# Altium PCB wificar.PcbDoc (part 2 of 3)
Units mil, origin at the board's own origin, x right, y up, seen from the top; angles counter-clockwise.
Board outline 3940.12 x 3943.17 mil, 2 copper layers (Top Layer, Bottom Layer); 89 components, 114 nets, 455 pads, 176 vias.
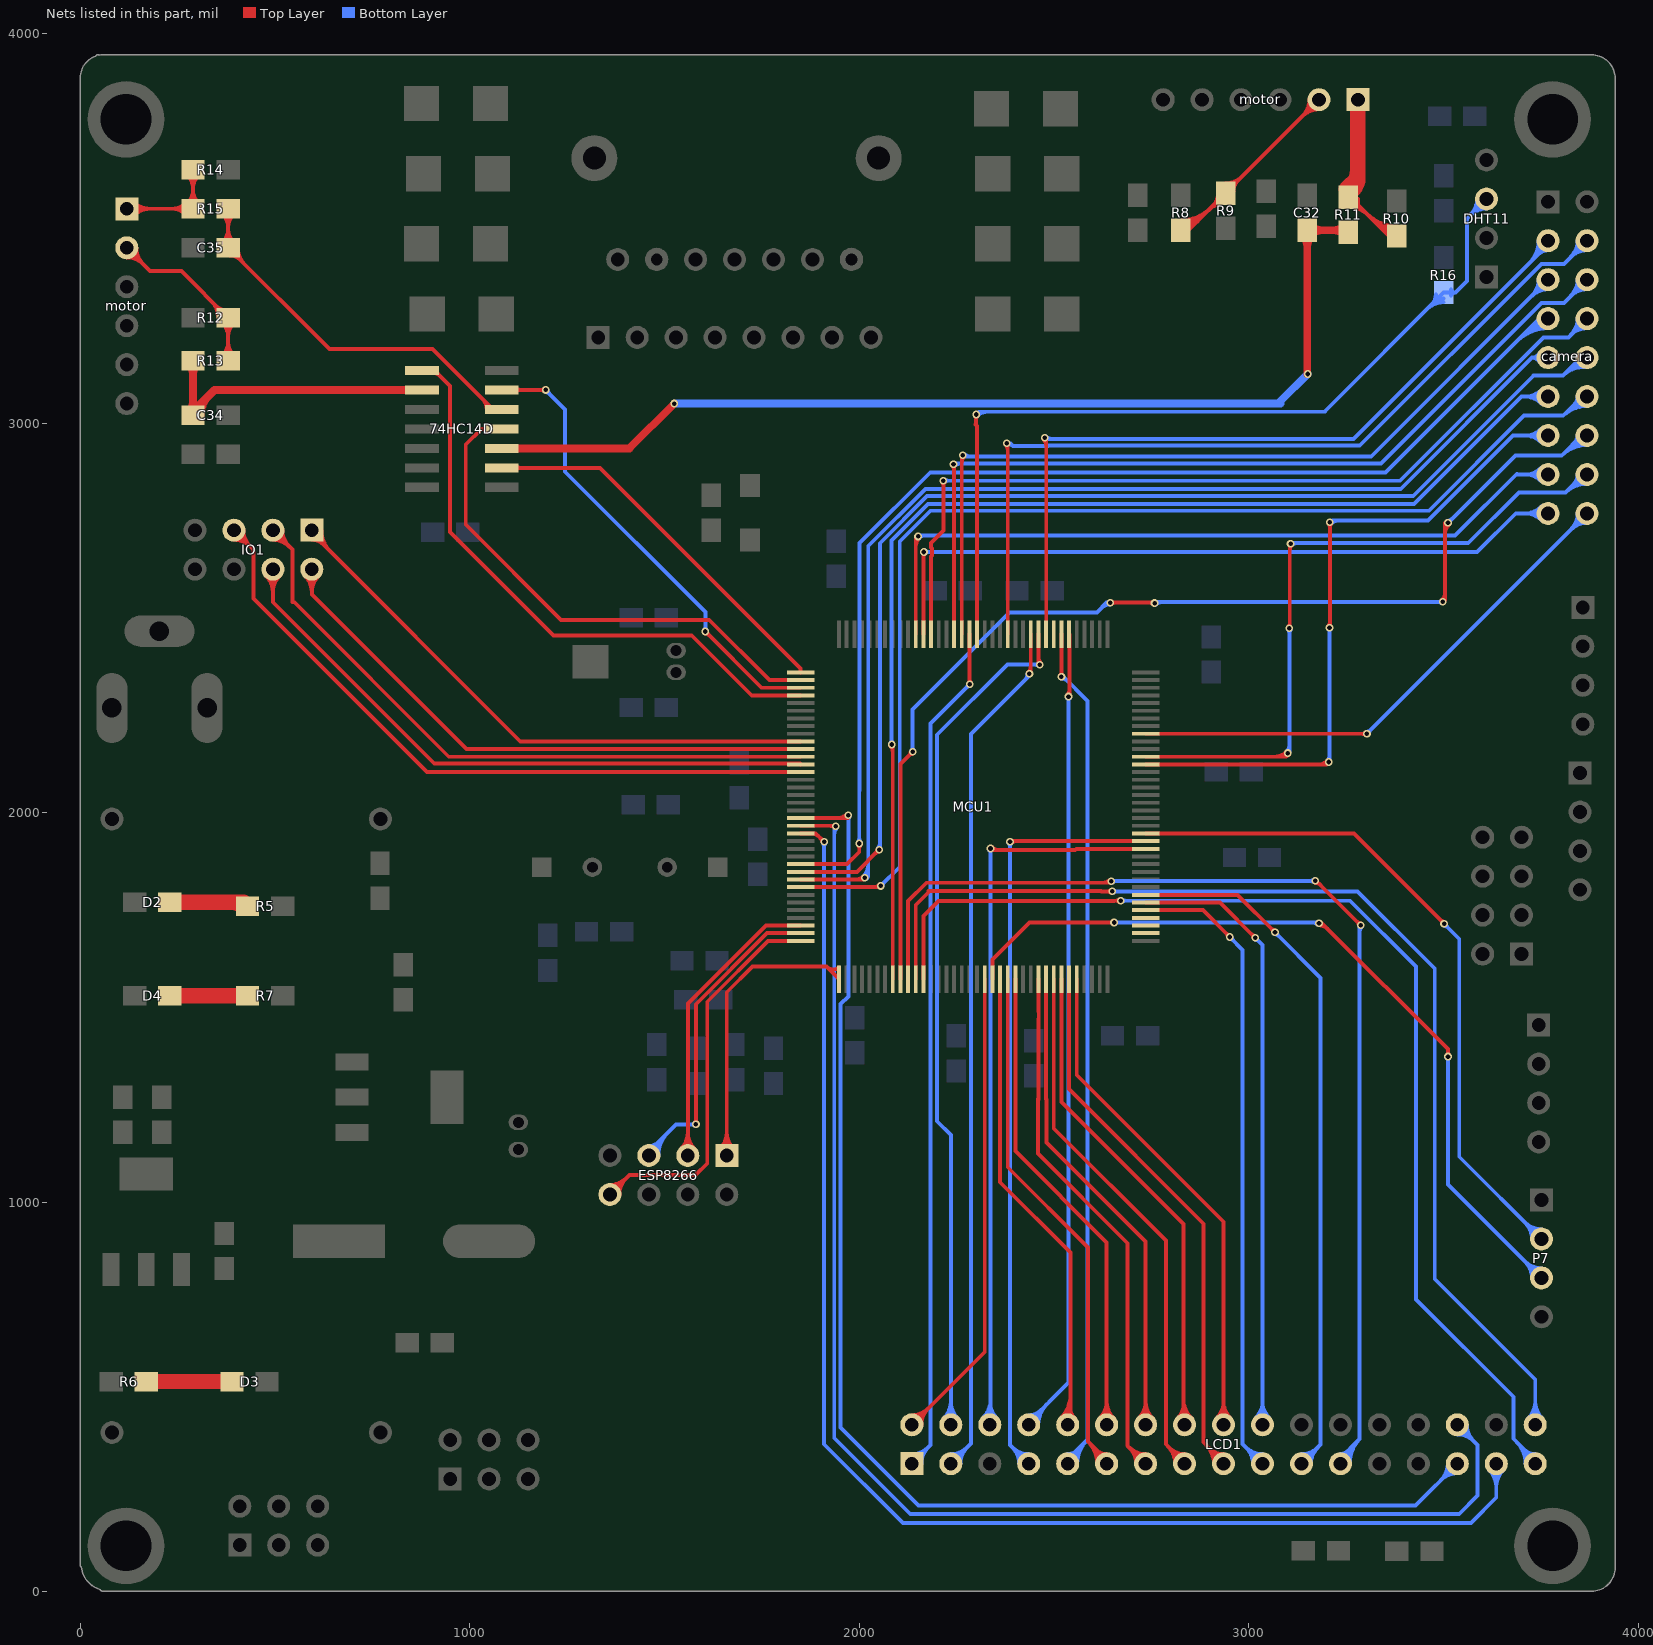
[diagram p2: the nets of this part, all layers, seen from the top]

## Via types
v1: diameter 19.68, hole 11.81, Top Layer to Bottom Layer, 175 vias
v2: diameter 50, hole 28, Top Layer to Bottom Layer, 1 vias

## Nets (pads, with @x,y where several pads share a name; then routed paths per layer and width w, separated by ;. In a path a pad name is that pad's centre, name@x,y a point inside that pad or via, vN(x,y) a via of type N, cw(c..) or ccw(c..) an arc to the next point about the centre after c; other vN are vias at no path point) (continued)
NetC32_2: 74HC14D.3 C32.2 R11.1 | length 2798.1
  Top Layer w20: 74HC14D.3@1082.36,2935 1410,2935 v1(1525,3050) ; C32.2@3139.33,3479.39 cw(c3113.72,3453.79) 3149.94,3453.79 cw(c3186.15,3453.79) C32.2@3160.54,3479.39 ; v1@3149.94,3126 C32.2@3149.94,3495 3250.06,3495 R11.1@3255.06,3490 ; C32.2@3160.54,3484.39 cw(c3186.15,3458.79) 3186.15,3495 cw(c3186.15,3531.21) C32.2@3160.54,3505.61 ; R11.1@3244.46,3484.39 ccw(c3218.85,3458.79) 3218.85,3495 ccw(c3218.85,3531.21) R11.1@3244.46,3505.61
  Bottom Layer w20: v1(1525,3050) 3081,3050 3081,3056 v1(3151,3126)
NetC34_2: 74HC14D.9 C34.2 R13.1 | length 930.8
  Top Layer w10: C34.2@290,3020.06 290,3030 C34.2@290,3020.06
  Top Layer w20: C34.2@279.39,3030.67 ccw(c253.78,3056.28) 290,3056.28 ; R13.1@279.39,3149.33 cw(c253.79,3123.72) 290,3123.72 cw(c326.21,3123.72) R13.1@300.61,3149.33 ; 290,3056.27 ccw(c326.21,3056.27) C34.2@300.61,3030.67 ; R13.1@290,3159.94 290,3030 345,3085 74HC14D.9@877.64,3085 ; C34.2@310,3020.06 cw(c382.27,3020.06) 331.17,3071.17
NetC35_1: 74HC14D.5 C35.1 R15.1 | length 1260.5
  Top Layer w10: C35.1@365.86,3464.14 ccw(c331.72,3498.28) 380,3498.28 ccw(c428.28,3498.28) C35.1@394.14,3464.14 ; R15.1@365.86,3535.86 cw(c331.72,3501.72) 380,3501.72 cw(c428.28,3501.72) R15.1@394.14,3535.86 ; R15.1@380,3550 C35.1@380,3450 640,3190 905,3190 1060,3035 74HC14D.5@1082.36,3035 ; C35.1@385,3430 cw(c385,3393.79) 410.61,3419.39 ; C35.1@395,3450 ccw(c431.21,3450) 405.61,3424.39 ; C35.1@405,3450 ccw(c465.36,3450) 422.68,3407.32 ; 1032.78,3062.22 cw(c1005.56,3035) 74HC14D.5@1044.05,3035
NetD2_1: D2.1 R5.2 | length 241.4
  Top Layer w39: D2.1@230,1770.06 420,1770.06 R5.2@430,1760.06 ; 387.58,1770.06 cw(c387.58,1722.64) R5.2@421.11,1756.17
NetD3_1: D3.1 R6.2 | length 220
  Top Layer w39: R6.2@170,539.94 D3.1@390,539.94
NetD4_1: D4.1 R7.2 | length 200
  Top Layer w39: D4.1@230,1530.06 R7.2@430,1530.06
NetJ1_2: 
NetJP4_1: motor.1@3280,3830 R10.1 R11.2 | length 907.6
  Top Layer w10: R11.2@3255.06,3555 cw(c3255.06,3482.73) 3306.17,3533.83 ; R11.2@3255.06,3565 cw(c3255.06,3516.87) 3289.1,3550.9 ; R11.2@3275.06,3575 ccw(c3299.36,3575) 3282.18,3557.82 ; 3280.06,3575 3280.06,3559.94 3360,3480 R10.1@3380.06,3480 ; 3303.13,3536.87 ccw(c3380.06,3613.8) R10.1@3380.06,3505 ; 3320.2,3519.8 ccw(c3380.06,3579.66) R10.1@3380.06,3495 ; 3337.28,3502.72 ccw(c3380.06,3545.51) R10.1@3380.06,3485 ; 3354.35,3485.65 ccw(c3380.06,3511.37) R10.1@3380.06,3475
  Top Layer w40: R11.2@3250,3600 3280,3630 ; R11.2@3251.53,3588.54 ccw(c3182.79,3657.27) 3280,3657.27 ; R11.2@3253.13,3589.61 ccw(c3236.21,3630) 3280,3630 ; R11.2@3260.06,3585 cw(c3320.57,3585) 3277.79,3627.79 ; motor.1@3280,3830 3280,3630
NetJP4_2: motor.2@3180,3830 R8.1 R9.2 | length 1077.8
  Top Layer w10: R8.1@2825.06,3490 ccw(c2825.06,3526.22) 2850.67,3500.61 ; R8.1@2825.06,3495 2845.06,3495 R9.2@2940.06,3590 2940.06,3590.06 motor.2@3180,3830 ; R8.1@2825.06,3500 ccw(c2825.06,3560.36) 2867.74,3517.68 ; R8.1@2825.06,3510 ccw(c2825.06,3594.5) 2884.81,3534.75 ; R8.1@2825.06,3520 ccw(c2825.06,3628.64) 2901.89,3551.82 ; 2897.39,3547.32 cw(c2940.06,3504.64) R9.2@2940.06,3565 ; 2909.46,3559.39 ccw(c2883.85,3585) R9.2@2920.06,3585 ; 2914.46,3564.39 cw(c2940.06,3538.79) R9.2@2940.06,3575 ; R9.2@2940.06,3605 ccw(c2940.06,3641.06) 2965.56,3615.56 ; R9.2@2940.06,3615 ccw(c2940.06,3675.2) 2982.63,3632.63 ; R9.2@2960.06,3595 cw(c2996.43,3595) 2970.72,3620.72 ; motor.2@3155.47,3830 cw(c3096.26,3830) 3138.13,3788.13 cw(c3180,3746.26) motor.2@3180,3805.47 ; motor.2@3165.47,3830 cw(c3130.4,3830) 3155.2,3805.2 cw(c3180,3780.4) motor.2@3180,3815.47
NetJP5_1: motor.1@120,3549.94 R14.2 R15.2 | length 649.8
  Top Layer w10: motor.1@120,3549.94 R15.2@279.94,3549.94 ; motor.1@130.27,3539.66 cw(c155.07,3514.86) 155.07,3549.94 cw(c155.07,3585.01) motor.1@130.27,3560.21 ; motor.1@137.34,3532.59 cw(c179.21,3490.72) 179.21,3549.94 cw(c179.21,3609.15) motor.1@137.34,3567.28 ; 236.56,3549.94 ccw(c236.56,3598.44) R15.2@270.86,3564.14 ; 236.87,3549.94 cw(c236.87,3501.87) R15.2@270.86,3535.86 ; R15.2@275.86,3564.14 ccw(c241.72,3598.28) 290,3598.28 ccw(c338.28,3598.28) R15.2@304.14,3564.14 ; R14.2@275.86,3635.86 cw(c241.72,3601.72) 290,3601.72 cw(c338.28,3601.72) R14.2@304.14,3635.86 ; R14.2@279.94,3639.94 R14.2@290,3650 R15.2@290,3550
NetJP5_2: motor.2@120,3449.94 R12.1 R13.2 | length 848.7
  Top Layer w10: motor.2@120,3425.41 cw(c120,3366.19) 161.87,3408.06 cw(c203.74,3449.94) motor.2@144.53,3449.94 ; motor.2@120,3435.41 cw(c120,3400.34) 144.8,3425.14 cw(c169.6,3449.94) motor.2@134.53,3449.94 ; motor.2@120,3449.94 179.94,3390 260.06,3390 R12.1@380,3270.06 R13.2@380,3159.94 ; 337.32,3312.74 cw(c294.64,3270.06) R12.1@355,3270.06 ; 349.39,3300.67 ccw(c375,3326.28) R12.1@375,3290.06 ; 354.39,3295.67 cw(c328.79,3270.06) R12.1@365,3270.06 ; R13.2@365.86,3174.08 ccw(c331.72,3208.22) 380,3208.22 ccw(c428.29,3208.22) R13.2@394.14,3174.08 ; R12.1@365.86,3255.92 cw(c331.71,3221.78) 380,3221.78 cw(c428.28,3221.78) R12.1@394.14,3255.92
NetLCD1_1: LCD1.1 MCU1.127 | length 2371.5
  Top Layer w10: v1@2282.72,2329.72 MCU1.127@2282.72,2458.45 ; 2282.72,2344.79 ccw(c2298.79,2344.79) v1@2287.42,2333.42 ; v1@2283,2330 v1(2284,2330)
  Bottom Layer w10: LCD1.1@2135,329 2183,377 2183,2229 v1(2284,2330) ; LCD1.1@2135,343.53 ccw(c2135,378.6) 2159.8,353.8 ccw(c2184.6,329) LCD1.1@2149.53,329 ; LCD1.1@2135,353.53 ccw(c2135,412.74) 2176.87,370.87 ccw(c2218.74,329) LCD1.1@2159.53,329 ; v1@2279.16,2330 cw(c2267.47,2330) 2275.73,2321.73 cw(c2284,2313.47) v1@2284,2325.16
NetLCD1_2: LCD1.2 MCU1.56 | length 1369.2
  Top Layer w10: LCD1.2@2135,429 2322.09,616.09 MCU1.56@2322.09,1572.62 ; LCD1.2@2135,443.53 ccw(c2135,478.6) 2159.8,453.8 ccw(c2184.6,429) LCD1.2@2149.53,429 ; LCD1.2@2135,453.53 ccw(c2135,512.74) 2176.87,470.87 ccw(c2218.74,429) LCD1.2@2159.53,429
NetLCD1_3: LCD1.3 MCU1.119 | length 2400.4
  Top Layer w10: v1@2433.38,2359.62 ccw(c2416.92,2376.08) 2440.2,2376.08 ; v1(2436.8,2356.2) 2440.2,2356.2 MCU1.119@2440.2,2458.45
  Bottom Layer w10: LCD1.3@2235,329 2286.94,380.94 2286.94,2201.94 2437,2352 v1@2437,2356.2 ; LCD1.3@2235,343.53 ccw(c2235,378.6) 2259.8,353.8 ccw(c2284.6,329) LCD1.3@2249.53,329 ; LCD1.3@2235,353.53 ccw(c2235,412.74) 2276.87,370.87 ccw(c2318.74,329) LCD1.3@2259.53,329 ; 2425.43,2340.43 ccw(c2409.67,2356.2) v1@2431.96,2356.2
NetLCD1_4: LCD1.4 MCU1.118 | length 2385.9
  Top Layer w10: v1@2459,2380 2459.88,2380.88 MCU1.118@2459.88,2458.45 ; 2459.88,2399.22 ccw(c2482.22,2399.22) v1@2466.42,2383.42
  Bottom Layer w10: LCD1.4@2217.66,446.34 ccw(c2175.79,488.21) 2235,488.21 ccw(c2294.21,488.21) LCD1.4@2252.34,446.34 ; LCD1.4@2224.73,439.27 ccw(c2199.93,464.07) 2235,464.07 ccw(c2270.07,464.07) LCD1.4@2245.27,439.27 ; LCD1.4@2235,429 2235,1173 2200,1208 2200,2200 2380,2380 v1(2463,2380) ; v1@2459.58,2376.58 ccw(c2451.31,2368.31) 2451.31,2380 ccw(c2451.31,2391.69) v1@2459.58,2383.42
NetLCD1_6: LCD1.6 MCU1.85 | length 2067.1
  Top Layer w10: v1(2337,1908) 2340.84,1904.16 2554.16,1904.16 2557.27,1907.27 MCU1.85@2735.47,1907.27 ; v1@2340.42,1911.42 ccw(c2357.97,1928.97) 2357.97,1904.16
  Bottom Layer w10: LCD1.6@2317.66,446.34 ccw(c2270.96,493.04) 2337,493.04 ; LCD1.6@2324.73,439.27 ccw(c2295.1,468.9) 2337,468.9 ; v1@2333.58,1904.58 cw(c2325.31,1896.31) 2337,1896.31 cw(c2348.69,1896.31) v1@2340.42,1904.58 ; LCD1.6@2335,429 2337,431 v1(2337,1908) ; 2337,459.24 ccw(c2365.24,459.24) LCD1.6@2345.27,439.27 ; 2337,483.39 ccw(c2389.39,483.39) LCD1.6@2352.34,446.34
NetLCD1_7: LCD1.7 MCU1.86 | length 2145.2
  Top Layer w10: v1@2387,1926.95 MCU1.86@2735.47,1926.95 ; v1@2390.42,1921.58 cw(c2403.41,1908.59) 2403.41,1926.95
  Bottom Layer w10: v1@2383.58,1921.58 cw(c2375.31,1913.31) 2387,1913.31 cw(c2398.69,1913.31) v1@2390.42,1921.58 ; v1(2387,1925) 2387,377 LCD1.7@2435,329 ; LCD1.7@2410.47,329 ccw(c2351.26,329) 2393.13,370.87 ccw(c2435,412.74) LCD1.7@2435,353.53 ; LCD1.7@2420.47,329 ccw(c2385.4,329) 2410.2,353.8 ccw(c2435,378.6) LCD1.7@2435,343.53
NetLCD1_8: LCD1.8 MCU1.114 | length 2240.3
  Top Layer w10: v1@2533.58,2301.42 ccw(c2518.6,2316.4) 2539.78,2316.4 ; v1(2537,2298) 2539.78,2300.78 2539.78,2457.29 MCU1.114@2538.62,2458.45
  Bottom Layer w10: LCD1.8@2435,429 2435,435 2537,537 v1(2537,2298) ; LCD1.8@2435,453.53 ccw(c2435,498.26) 2466.63,466.63 ; LCD1.8@2449.53,429 cw(c2499.09,429) 2464.04,464.04 ; LCD1.8@2459.53,429 cw(c2533.23,429) 2481.11,481.11 ; v1@2533.58,2294.58 cw(c2525.31,2286.31) 2537,2286.31 cw(c2548.69,2286.31) v1@2540.42,2294.58
NetLCD1_9: LCD1.9 MCU1.115 | length 2389.3
  Top Layer w10: v1@2515.51,2352.42 ccw(c2507.25,2360.69) 2518.94,2360.69 ccw(c2530.63,2360.69) v1@2522.36,2352.42 ; v1(2518.94,2349) MCU1.115@2518.94,2458.45
  Bottom Layer w10: v1@2518.94,2344.16 cw(c2518.94,2320.24) 2535.85,2337.15 ; v1(2518.94,2349) 2524,2349 2586,2287 2586,391 2535,340 LCD1.9@2535,329 ; LCD1.9@2535,353.53 ccw(c2535,386.19) 2558.09,363.09 ; LCD1.9@2539.53,329 cw(c2577.01,329) 2550.51,355.51 ; LCD1.9@2549.53,329 cw(c2611.16,329) 2567.58,372.58 ; LCD1.9@2559.53,329 cw(c2645.3,329) 2584.65,389.65
NetLCD1_10: LCD1.10 MCU1.58 | length 1360.6
  Top Layer w10: MCU1.58@2361.46,1572.62 2361.46,1051.54 2542,871 2542,436 LCD1.10@2535,429 ; LCD1.10@2517.66,446.34 ccw(c2458.89,505.11) 2542,505.11 ; LCD1.10@2524.73,439.27 ccw(c2483.03,480.97) 2542,480.97 ; 2542,471.32 ccw(c2577.32,471.32) LCD1.10@2552.34,446.34
NetLCD1_11: LCD1.11 MCU1.59 | length 1485.8
  Top Layer w10: MCU1.59@2381.14,1572.62 2381.14,1089.86 2587,884 2587,386 ; 2604,369 cw(c2564.22,329.23) LCD1.11@2620.47,329.05 ; 2608.49,364.51 ccw(c2635,391.01) LCD1.11@2635,353.53 ; LCD1.11@2610.47,329.08 ccw(c2530.34,329.33) 2587,386 ; LCD1.11@2635,329 2635,338 2587,386
NetLCD1_12: LCD1.12 MCU1.60 | length 1388.7
  Top Layer w10: MCU1.60@2400.83,1572.62 2400.83,1131.17 2635,897 LCD1.12@2635,429 ; LCD1.12@2617.66,446.34 ccw(c2575.79,488.21) 2635,488.21 ccw(c2694.21,488.21) LCD1.12@2652.34,446.34 ; LCD1.12@2624.73,439.27 ccw(c2599.93,464.07) 2635,464.07 ccw(c2670.07,464.07) LCD1.12@2645.27,439.27
NetLCD1_13: LCD1.13 MCU1.63 | length 1509
  Top Layer w10: MCU1.63@2459.88,1572.62 2459.88,1489.59 2460.84,1488.63 2460.84,1471.37 2459.88,1470.41 2459.88,1264.12 2459,1265 2459,1125 2689,895 2689,375 LCD1.13@2735,329 ; LCD1.13@2710.47,329 ccw(c2651.26,329) 2693.13,370.87 ccw(c2735,412.74) LCD1.13@2735,353.53 ; LCD1.13@2720.47,329 ccw(c2685.4,329) 2710.2,353.8 ccw(c2735,378.6) LCD1.13@2735,343.53
NetLCD1_14: LCD1.14 MCU1.64 | length 1397.5
  Top Layer w10: MCU1.64@2479.57,1572.62 2479.57,1264.43 2480.31,1263.69 2480.31,1153.69 2735,899 LCD1.14@2735,429 ; LCD1.14@2717.66,446.34 ccw(c2675.79,488.21) 2735,488.21 ccw(c2794.21,488.21) LCD1.14@2752.34,446.34 ; LCD1.14@2724.73,439.27 ccw(c2699.93,464.07) 2735,464.07 ccw(c2770.07,464.07) LCD1.14@2745.27,439.27
NetLCD1_15: LCD1.15 MCU1.65 | length 1530.8
  Top Layer w10: MCU1.65@2499.25,1572.62 2499.25,1189.75 2787,902 2787,379 2835,331 LCD1.15@2835,329 ; 2791.71,374.29 cw(c2746.43,329) LCD1.15@2810.47,329 ; 2796.54,369.46 ccw(c2835,407.91) LCD1.15@2835,353.53 ; 2808.79,357.21 cw(c2780.57,329) LCD1.15@2820.47,329 ; 2813.61,352.39 ccw(c2835,373.77) LCD1.15@2835,343.53
NetLCD1_16: LCD1.16 MCU1.66 | length 1403.1
  Top Layer w10: MCU1.66@2518.94,1572.62 2518.94,1257.06 2832,944 2832,432 LCD1.16@2835,429 ; LCD1.16@2817.66,446.34 ccw(c2783.03,480.97) 2832,480.97 ; 2832,471.32 ccw(c2877.32,471.32) LCD1.16@2845.27,439.27 ; 2832,495.46 ccw(c2901.46,495.46) LCD1.16@2852.34,446.34
NetLCD1_17: LCD1.17 MCU1.67 | length 1556.7
  Top Layer w10: MCU1.67@2538.62,1572.62 2538.62,1290.38 2884,945 2884,385 2883,384 2935,332 LCD1.17@2935,329 ; 2891.01,375.99 cw(c2844.02,329) LCD1.17@2910.47,329 ; 2898.25,368.75 ccw(c2935,405.5) LCD1.17@2935,353.53 ; 2908.08,358.92 cw(c2878.16,329) LCD1.17@2920.47,329 ; 2915.32,351.68 ccw(c2935,371.36) LCD1.17@2935,343.53
NetLCD1_18: LCD1.18 MCU1.68 | length 1447.8
  Top Layer w10: MCU1.68@2558.31,1572.62 2558.31,1326.69 2935,950 LCD1.18@2935,429 ; LCD1.18@2917.66,446.34 ccw(c2875.79,488.21) 2935,488.21 ccw(c2994.21,488.21) LCD1.18@2952.34,446.34 ; LCD1.18@2924.73,439.27 ccw(c2899.93,464.07) 2935,464.07 ccw(c2970.07,464.07) LCD1.18@2945.27,439.27
NetLCD1_19: LCD1.19 MCU1.77 | length 1815.6
  Top Layer w10: MCU1.77@2735.47,1749.79 2882.21,1749.79 v1(2951,1681) ; v1@2946.16,1681 ccw(c2934.47,1681) 2942.73,1689.27 ccw(c2951,1697.53) v1@2951,1685.84
  Bottom Layer w10: v1@2951,1676.16 cw(c2951,1664.47) 2959.27,1672.73 cw(c2967.53,1681) v1@2955.84,1681 ; v1(2951,1681) 2984,1648 2984,380 LCD1.19@3035,329 ; LCD1.19@3010.47,329 ccw(c2951.26,329) 2993.13,370.87 ccw(c3035,412.74) LCD1.19@3035,353.53 ; LCD1.19@3020.47,329 ccw(c2985.4,329) 3010.2,353.8 ccw(c3035,378.6) LCD1.19@3035,343.53
NetLCD1_20: LCD1.20 MCU1.78 | length 1760.7
  Top Layer w10: MCU1.78@2735.47,1769.47 2925.53,1769.47 v1(3016,1679) ; v1@3011.16,1679 ccw(c2999.47,1679) 3007.73,1687.27 ccw(c3016,1695.53) v1@3016,1683.84
  Bottom Layer w10: v1@3016,1674.16 cw(c3016,1662.47) 3024.27,1670.73 cw(c3032.53,1679) v1@3020.84,1679 ; v1(3016,1679) 3035,1660 LCD1.20@3035,429 ; LCD1.20@3017.66,446.34 ccw(c2975.79,488.21) 3035,488.21 ccw(c3094.21,488.21) LCD1.20@3052.34,446.34 ; LCD1.20@3024.73,439.27 ccw(c2999.93,464.07) 3035,464.07 ccw(c3070.07,464.07) LCD1.20@3045.27,439.27
NetLCD1_21: LCD1.21 MCU1.79 | length 1989
  Top Layer w10: MCU1.79@2735.47,1789.16 2970.84,1789.16 v1(3067,1693) ; v1@3062.16,1693 ccw(c3050.47,1693) 3058.73,1701.27 ccw(c3067,1709.53) v1@3067,1697.84
  Bottom Layer w10: v1@3067,1688.16 cw(c3067,1676.47) 3075.27,1684.73 cw(c3083.53,1693) v1@3071.84,1693 ; v1(3067,1693) 3184,1576 3184,378 LCD1.21@3135,329 ; LCD1.21@3135,343.53 ccw(c3135,378.6) 3159.8,353.8 ccw(c3184.6,329) LCD1.21@3149.53,329 ; LCD1.21@3135,353.53 ccw(c3135,412.74) 3176.87,370.87 ccw(c3218.74,329) LCD1.21@3159.53,329
NetLCD1_23: LCD1.23 MCU1.46 | length 3107.8
  Top Layer w10: MCU1.46@2125.24,1572.62 2125.24,1773.24 2172.24,1820.24 2643.24,1820.24 v1(2647,1824) ; 2626.22,1820.24 ccw(c2626.22,1844.78) v1@2643.58,1827.42 ; v1@3170,1820.16 cw(c3170,1801.22) 3183.39,1814.61 ; v1(3170,1825) 3173,1825 v1(3287,1711) ; v1@3282.16,1711 ccw(c3270.47,1711) 3278.73,1719.27 ccw(c3287,1727.53) v1@3287,1715.84
  Bottom Layer w10: v1(2647,1824) 2648,1825 v1(3170,1825) ; v1@2650.42,1820.58 cw(c2661.1,1809.89) 2661.1,1825 ; v1@3166.58,1821.58 ccw(c3158.31,1813.31) 3158.31,1825 ccw(c3158.31,1836.69) v1@3166.58,1828.42 ; LCD1.23@3235,329 3235,343 3284,392 ; LCD1.23@3235,353.53 ccw(c3235,378.94) 3252.97,360.97 ; LCD1.23@3239.52,329.16 cw(c3280.35,330.58) 3251.47,359.47 ; LCD1.23@3249.52,329.5 cw(c3311.79,331.67) 3267.73,375.73 ; LCD1.23@3259.51,329.85 cw(c3343.23,332.76) 3284,392 ; 3284,1692.07 cw(c3305.93,1692.07) v1@3290.42,1707.58 ; v1(3287,1711) 3284,1708 3284,392
NetLCD1_29: LCD1.29 MCU1.20 | length 3612.7
  Top Layer w10: MCU1.20@1849.65,1986.01 1971.01,1986.01 1972,1987 v1(1972,1993) ; 1943.43,1986.01 ccw(c1943.43,2021.57) v1@1968.58,1996.42
  Bottom Layer w10: v1@1968.58,1989.58 cw(c1960.31,1981.31) 1972,1981.31 cw(c1983.69,1981.31) v1@1975.42,1989.58 ; v1(1972,1993) 1972,1528.62 1951.94,1508.56 1951.94,422.06 2152,222 3428,222 LCD1.29@3535,329 ; LCD1.29@3510.47,329 cw(c3451.26,329) 3493.13,287.13 cw(c3535,245.26) LCD1.29@3535,304.47 ; LCD1.29@3520.47,329 cw(c3485.4,329) 3510.2,304.2 cw(c3535,279.4) LCD1.29@3535,314.47
NetLCD1_30: LCD1.30 MCU1.21 | length 3798.3
  Top Layer w10: MCU1.21@1849.65,1966.32 1938.68,1966.32 v1(1940,1965) ; 1925.11,1966.32 cw(c1925.11,1950.11) v1@1936.58,1961.58
  Bottom Layer w10: 1935.94,1943.5 cw(c1961.5,1943.5) v1@1943.42,1961.58 ; v1(1940,1965) 1935.94,1960.94 1935.94,395.06 2131,200 3540,200 3587,247 3587,377 LCD1.30@3535,429 ; LCD1.30@3535,404.47 cw(c3535,345.26) 3576.87,387.13 cw(c3618.74,429) LCD1.30@3559.53,429 ; LCD1.30@3535,414.47 cw(c3535,379.4) 3559.8,404.2 cw(c3584.6,429) LCD1.30@3549.53,429
NetLCD1_31: LCD1.31 MCU1.22 | length 3738.5
  Top Layer w10: MCU1.22@1849.65,1946.64 1888.36,1946.64 v1(1910,1925) ; MCU1.22@1880.08,1946.64 cw(c1880.08,1926.64) 1894.22,1940.78 ; v1@1905.16,1925 ccw(c1893.47,1925) 1901.73,1933.27 ccw(c1910,1941.53) v1@1910,1929.84
  Bottom Layer w10: v1@1906.58,1921.58 cw(c1898.31,1913.31) 1910,1913.31 cw(c1921.69,1913.31) v1@1913.42,1921.58 ; v1(1910,1925) 1910,379 2112,177 3570,177 3635,242 LCD1.31@3635,329 ; LCD1.31@3617.66,311.66 cw(c3575.79,269.79) 3635,269.79 cw(c3694.21,269.79) LCD1.31@3652.34,311.66 ; LCD1.31@3624.73,318.73 cw(c3599.93,293.93) 3635,293.93 cw(c3670.07,293.93) LCD1.31@3645.27,318.73
NetLCD1_33: LCD1.33 MCU1.48 | length 3087.8
  Top Layer w10: MCU1.48@2164.61,1572.62 2164.61,1734.39 2203.21,1773 2654,1773 2655,1774 v1(2671,1774) ; v1@2667.58,1770.58 ccw(c2659.31,1762.31) 2659.31,1774 ccw(c2659.31,1785.69) v1@2667.58,1777.42
  Bottom Layer w10: v1(2671,1774) 3260,1774 3429,1605 3429,751 3679,501 3679,393 3735,337 LCD1.33@3735,329 ; v1@2674.42,1770.58 cw(c2682.69,1762.31) 2682.69,1774 cw(c2682.69,1785.69) v1@2674.42,1777.42 ; 3687.47,384.53 cw(c3631.94,329) LCD1.33@3710.47,329 ; 3704.54,367.46 cw(c3666.09,329) LCD1.33@3720.47,329 ; 3706.79,365.21 ccw(c3735,393.43) LCD1.33@3735,353.53
NetLCD1_34: LCD1.34 MCU1.47 | length 3084.8
  Top Layer w10: MCU1.47@2144.92,1572.62 2144.92,1762.92 2177,1795 2177,1799 2621,1799 2622,1798 v1(2649,1798) ; v1@2645.58,1794.58 ccw(c2637.31,1786.31) 2637.31,1798 ccw(c2637.31,1809.69) v1@2645.58,1801.42
  Bottom Layer w10: v1(2649,1798) 3279,1798 3477,1600 3477,803 3735,545 LCD1.34@3735,429 ; v1@2652.42,1794.58 cw(c2660.69,1786.31) 2660.69,1798 cw(c2660.69,1809.69) v1@2652.42,1801.42 ; LCD1.34@3717.66,446.34 ccw(c3675.79,488.21) 3735,488.21 ccw(c3794.21,488.21) LCD1.34@3752.34,446.34 ; LCD1.34@3724.73,439.27 ccw(c3699.93,464.07) 3735,464.07 ccw(c3770.07,464.07) LCD1.34@3745.27,439.27
NetMCU1_1: 74HC14D.2 MCU1.1 | length 1016.6
  Top Layer w10: 74HC14D.2@1082.36,2885 1335,2885 1849.65,2370.35 MCU1.1@1849.65,2360.02 ; 74HC14D.2@1118.67,2880.18 cw(c1130.3,2868.56) 1130.3,2885 cw(c1130.3,2901.44) 74HC14D.2@1118.67,2889.82
NetMCU1_2: 74HC14D.4 MCU1.2 | length 1365
  Top Layer w10: 74HC14D.4@1046.05,2980.18 ccw(c1034.42,2968.56) 1034.42,2985 ccw(c1034.42,3001.44) 74HC14D.4@1046.05,2989.82 ; 74HC14D.4@1082.36,2985 1030,2985 990,2945 990,2740 1235,2495 1615,2495 1769.66,2340.34 MCU1.2@1849.65,2340.34
NetMCU1_3: 74HC14D.6 MCU1.3 | length 1306.2
  Top Layer w10: 74HC14D.6@1082.36,3085 v1(1195,3085) ; 74HC14D.6@1118.67,3080.18 cw(c1130.3,3068.56) 1130.3,3085 cw(c1130.3,3101.44) 74HC14D.6@1118.67,3089.82 ; v1@1191.58,3081.58 ccw(c1183.31,3073.31) 1183.31,3085 ccw(c1183.31,3096.69) v1@1191.58,3088.42 ; v1@1605,2460.16 cw(c1605,2448.47) 1613.27,2456.73 cw(c1621.53,2465) v1@1609.84,2465 ; v1(1605,2465) 1749.35,2320.65 MCU1.3@1849.65,2320.65
  Bottom Layer w10: v1@1195,3080.16 cw(c1195,3068.47) 1203.27,3076.73 cw(c1211.53,3085) v1@1199.84,3085 ; v1(1195,3085) 1245,3035 1245,2875 1605,2515 v1(1605,2465) ; v1@1601.58,2468.42 ccw(c1593.31,2476.69) 1605,2476.69 ccw(c1616.69,2476.69) v1@1608.42,2468.42
NetMCU1_4: 74HC14D.8 MCU1.4 | length 1563
  Top Layer w10: 74HC14D.8@877.64,3135 910,3135 950,3095 950,2720 1215,2455 1570,2455 1724.03,2300.97 MCU1.4@1849.65,2300.97 ; 74HC14D.8@909.13,3128.19 cw(c909.13,3109.66) 922.24,3122.76 ; 74HC14D.8@915.95,3135 ccw(c930.3,3135) 74HC14D.8@920.15,3124.85
NetMCU1_26: camera.7 MCU1.26 | length 3206.7
  Top Layer w10: MCU1.26@1849.65,1867.9 1968.9,1867.9 2000,1899 v1(2000,1921) ; v1@1996.58,1917.58 cw(c1988.31,1909.31) 2000,1909.31 cw(c2011.69,1909.31) v1@2003.42,1917.58
  Bottom Layer w10: v1@1996.58,1924.42 ccw(c1988.31,1932.69) 2000,1932.69 ccw(c2011.69,1932.69) v1@2003.42,1924.42 ; v1(2000,1921) 2000,2056 2001,2057 2001,2692 2182.16,2873.16 3351.16,2873.16 3746,3268 camera.7@3768,3268 ; 3688.57,3210.57 cw(c3768,3131.15) camera.7@3768,3243.47 ; 3705.64,3227.64 cw(c3768,3165.29) camera.7@3768,3253.47 ; 3722.71,3244.71 cw(c3768,3199.43) camera.7@3768,3263.47
NetMCU1_27: camera.10 MCU1.27 | length 3226.1
  Top Layer w10: MCU1.27@1849.65,1848.21 1994.21,1848.21 v1(2051,1905) ; v1@2046.16,1905 cw(c2034.47,1905) 2042.73,1896.73 cw(c2051,1888.47) v1@2051,1900.16
  Bottom Layer w10: v1@2047.58,1908.42 ccw(c2034.48,1921.52) 2053,1921.52 ; v1(2051,1905) 2053,1905 2053,1988.37 2053,2691.63 2174.37,2813 3422,2813 3730.5,3121.5 3730,3122 3806,3122 ; 3821.07,3137.07 cw(c3861.41,3096.73) camera.10@3866.66,3153.53 ; 3836.13,3152.13 cw(c3863.96,3124.31) camera.10@3867.58,3163.49 ; 3837.44,3153.44 ccw(c3822.89,3168) camera.10@3843.47,3168 ; camera.10@3865.74,3143.58 ccw(c3858.85,3069.15) 3806,3122 ; camera.10@3868,3168 3852,3168 3806,3122
NetMCU1_28: camera.9 MCU1.28 | length 3083.8
  Top Layer w10: MCU1.28@1849.65,1828.53 2009.53,1828.53 v1(2014,1833) ; 1991.52,1828.53 ccw(c1991.52,1855.48) v1@2010.58,1836.42
  Bottom Layer w10: v1@2010.58,1836.42 ccw(c1980.58,1866.42) 2023,1866.42 ; v1(2014,1833) 2023,1842 2023,2684.25 2169.9,2831.16 3389.78,2831.16 3726.63,3168 ; v1@2017.65,1829.35 ccw(c2004.72,1842.28) 2023,1842.28 ; camera.9@3746.48,3156.23 ccw(c3726.63,3145.37) 3726.63,3168 ; camera.9@3746.48,3179.77 cw(c3726.63,3190.63) 3726.63,3168 ; camera.9@3768,3168 3726.63,3168
NetMCU1_29: camera.12 MCU1.29 | length 3235.4
  Top Layer w10: MCU1.29@1849.65,1808.84 2051.84,1808.84 v1(2055,1812) ; 2035.69,1808.84 ccw(c2035.69,1831.31) v1@2051.58,1815.42
  Bottom Layer w10: v1(2055,1812) 2103.84,1860.84 2103.84,2695.84 2183,2775 3462,2775 3706,3019 3807,3019 ; v1@2055,1816.84 ccw(c2055,1828.53) 2063.27,1820.27 ccw(c2071.53,1812) v1@2059.84,1812 ; 3823.66,3035.66 cw(c3866.69,2992.64) camera.12@3867.75,3053.47 ; 3834.61,3046.61 ccw(c3813.23,3068) camera.12@3843.47,3068 ; 3840.32,3052.32 cw(c3867.26,3025.39) camera.12@3867.92,3063.47 ; camera.12@3867.57,3043.48 ccw(c3866.12,2959.89) 3807,3019 ; camera.12@3868,3068 3856,3068 3807,3019
NetMCU1_34: ESP8266.3 MCU1.34 | length 910.8
  Top Layer w10: ESP8266.3@1542.66,1137.34 ccw(c1500.79,1179.21) 1560,1179.21 ccw(c1619.21,1179.21) ESP8266.3@1577.34,1137.34 ; ESP8266.3@1549.73,1130.27 ccw(c1524.93,1155.07) 1560,1155.07 ccw(c1595.07,1155.07) ESP8266.3@1570.27,1130.27 ; ESP8266.3@1560,1120 1560,1510 1760.42,1710.42 MCU1.34@1849.65,1710.42
NetMCU1_35: ESP8266.5 MCU1.35 | length 988.7
  Top Layer w10: v1@1577.42,1203.42 ccw(c1569.15,1211.69) 1580.84,1211.69 ccw(c1592.53,1211.69) v1@1584.27,1203.42 ; v1(1580.84,1200) 1580.84,1508.22 1763.36,1690.73 MCU1.35@1849.65,1690.73
  Bottom Layer w10: ESP8266.5@1460,1120 1460,1130 1530,1200 v1(1580.84,1200) ; ESP8266.5@1460,1144.53 ccw(c1460,1179.6) 1484.8,1154.8 ; ESP8266.5@1474.53,1120 cw(c1533.74,1120) 1491.87,1161.87 ; ESP8266.5@1484.53,1120 cw(c1567.88,1120) 1508.94,1178.94 ; v1@1577.42,1196.58 ccw(c1569.15,1188.31) 1569.15,1200 ccw(c1569.15,1211.69) v1@1577.42,1203.42
NetMCU1_36: ESP8266.8 MCU1.36 | length 1150.4
  Top Layer w10: ESP8266.8@1360,1020 1410,1070 1580,1070 1610,1100 1610,1514.75 1766.3,1671.05 MCU1.36@1849.65,1671.05 ; ESP8266.8@1360,1034.53 ccw(c1360,1069.6) 1384.8,1044.8 ccw(c1409.6,1020) ESP8266.8@1374.53,1020 ; ESP8266.8@1360,1044.53 ccw(c1360,1103.74) 1401.87,1061.87 ccw(c1443.74,1020) ESP8266.8@1384.53,1020
NetMCU1_37: ESP8266.1 MCU1.37 | length 931.4
  Top Layer w10: ESP8266.1@1642.66,1137.34 ccw(c1600.79,1179.21) 1660,1179.21 ccw(c1719.21,1179.21) ESP8266.1@1677.34,1137.34 ; ESP8266.1@1649.73,1130.27 ccw(c1624.93,1155.07) 1660,1155.07 ccw(c1695.07,1155.07) ESP8266.1@1670.27,1130.27 ; ESP8266.1@1660,1120 1660,1539 1726,1605 1915.7,1605 ; MCU1.37@1948.07,1572.62 1915.7,1605 ; MCU1.37@1948.07,1603.06 cw(c1932.98,1622.28) 1915.7,1605
NetMCU1_44: camera.11 MCU1.44 | length 3148.7
  Top Layer w10: v1@2079.58,2171.58 cw(c2064.39,2156.39) 2085.87,2156.39 ; v1(2083,2175) 2085.87,2172.13 MCU1.44@2085.87,1572.62
  Bottom Layer w10: v1@2079.58,2178.42 ccw(c2071.31,2186.69) 2083,2186.69 ccw(c2094.69,2186.69) v1@2086.42,2178.42 ; v1(2083,2175) 2083,2699 2176,2792 3423.63,2792 3699.63,3068 camera.11@3768,3068 ; camera.11@3750.66,3050.66 ccw(c3708.79,3008.79) 3708.79,3068 ccw(c3708.79,3127.21) camera.11@3750.66,3085.34 ; camera.11@3757.73,3057.73 ccw(c3732.93,3032.93) 3732.93,3068 ccw(c3732.93,3103.07) camera.11@3757.73,3078.27
NetMCU1_45: camera.14 MCU1.45 | length 3236.2
  Top Layer w10: MCU1.45@2105.55,1572.62 2105.55,2124.55 v1(2137,2156) ; v1@2132.16,2156 cw(c2120.47,2156) 2128.73,2147.73 cw(c2137,2139.47) v1@2137,2151.16 ; v1(2644,2539) 2757,2539 v1(2758,2538) ; v1@2647.42,2535.58 cw(c2655.69,2527.31) 2655.69,2539 cw(c2655.69,2550.69) v1@2647.42,2542.42 ; 2743.9,2539 cw(c2743.9,2523.9) v1@2754.58,2534.58 ; v1@3494.58,2544.42 ccw(c3474.24,2564.76) 3503,2564.76 ; v1(3498,2541) 3503,2546 3503,2744 v1(3511,2744) ; 3503,2713 cw(c3542,2713) v1@3514.42,2740.58 ; 3503,2737.14 cw(c3517.86,2737.14) v1@3507.35,2747.65
  Bottom Layer w10: v1@2133.58,2159.42 ccw(c2125.31,2167.69) 2137,2167.69 ccw(c2148.69,2167.69) v1@2140.42,2159.42 ; v1(2137,2156) 2137,2265 2386,2514 2610,2514 2635,2539 v1(2644,2539) ; 2620.37,2524.37 cw(c2644,2500.74) v1@2644,2534.16 ; v1(2758,2538) 2761,2541 v1(3498,2541) ; v1@2761.42,2534.58 cw(c2776.93,2519.07) 2776.93,2541 ; v1@3494.58,2537.58 ccw(c3486.31,2529.31) 3486.31,2541 ccw(c3486.31,2552.69) v1@3494.58,2544.42 ; v1(3511,2744) 3684,2917 3803,2917 ; v1@3511,2748.84 ccw(c3511,2760.53) 3519.27,2752.27 ccw(c3527.53,2744) v1@3515.84,2744 ; 3819.85,2933.85 cw(c3867.23,2886.47) camera.14@3867.86,2953.47 ; 3836.03,2950.03 ccw(c3818.06,2968) camera.14@3843.47,2968 ; 3836.7,2950.7 cw(c3867.55,2919.84) camera.14@3867.96,2963.47 ; camera.14@3867.77,2943.47 ccw(c3866.92,2853.09) 3803,2917 ; camera.14@3868,2968 3854,2968 3803,2917
NetMCU1_57: MCU1.57 P7.3 | length 2342.3
  Top Layer w10: MCU1.57@2341.77,1572.62 2341.77,1622.77 2437,1718 v1(2654,1718) ; v1@2650.58,1714.58 ccw(c2642.31,1706.31) 2642.31,1718 ccw(c2642.31,1729.69) v1@2650.58,1721.42 ; v1@3180,1711.16 cw(c3180,1680.15) 3201.92,1702.08 ; v1(3180,1716) 3188,1716 3511,1393 v1(3511,1374) ; v1@3507.58,1377.42 ccw(c3499.31,1385.69) 3511,1385.69 ccw(c3522.69,1385.69) v1@3514.42,1377.42
  Bottom Layer w10: v1(2654,1718) 3178,1718 v1(3180,1716) ; v1@2657.42,1714.58 cw(c2665.69,1706.31) 2665.69,1718 cw(c2665.69,1729.69) v1@2657.42,1721.42 ; 3163.48,1718 cw(c3163.48,1699.48) v1@3176.58,1712.58 ; v1@3507.58,1370.58 cw(c3499.31,1362.31) 3511,1362.31 cw(c3522.69,1362.31) v1@3514.42,1370.58 ; v1@3511,1376 3511,1046 P7.3@3751,806 ; P7.3@3726.47,806 ccw(c3667.26,806) 3709.13,847.87 ccw(c3751,889.74) P7.3@3751,830.53 ; P7.3@3736.47,806 ccw(c3701.4,806) 3726.2,830.8 ccw(c3751,855.6) P7.3@3751,820.53
NetMCU1_74: MCU1.74
NetMCU1_75: MCU1.75
NetMCU1_76: MCU1.76
NetMCU1_87: MCU1.87 P7.2 | length 1959.4
  Top Layer w10: MCU1.87@2735.47,1946.64 3270.36,1946.64 3501,1716 v1(3501,1715) ; 3492.03,1724.97 cw(c3482.05,1715) v1@3496.16,1715 ; 3494.44,1722.56 ccw(c3501,1729.12) v1@3501,1719.84
  Bottom Layer w10: v1@3501,1710.16 cw(c3501,1698.47) 3509.27,1706.73 cw(c3517.53,1715) v1@3505.84,1715 ; v1(3501,1715) 3540,1676 3540,1117 P7.2@3751,906 ; P7.2@3726.47,906 ccw(c3667.26,906) 3709.13,947.87 ccw(c3751,989.74) P7.2@3751,930.53 ; P7.2@3736.47,906 ccw(c3701.4,906) 3726.2,930.8 ccw(c3751,955.6) P7.2@3751,920.53
NetMCU1_96: camera.13 MCU1.96 | length 2000.3
  Top Layer w10: MCU1.96@2735.47,2123.8 3198.8,2123.8 v1(3205,2130) ; 3178.35,2123.8 ccw(c3178.35,2156.65) v1@3201.58,2133.42 ; v1@3203.58,2478.42 ccw(c3192.9,2489.1) 3208,2489.1 ; v1@3204.58,2741.58 cw(c3196.31,2733.31) 3208,2733.31 cw(c3219.69,2733.31) v1@3211.42,2741.58 ; v1(3207,2475) 3208,2476 v1(3208,2745)
  Bottom Layer w10: v1@3201.58,2133.42 ccw(c3188.48,2146.52) 3207,2146.52 ; v1@3203.58,2471.58 cw(c3195.31,2463.31) 3207,2463.31 cw(c3218.69,2463.31) v1@3210.42,2471.58 ; v1(3205,2130) 3207,2132 v1(3207,2475) ; v1(3208,2745) 3209,2745 3214,2750 3459.63,2750 3677.63,2968 camera.13@3768,2968 ; v1@3211.42,2741.58 cw(c3231.76,2721.24) 3231.76,2750 ; camera.13@3750.66,2950.66 ccw(c3708.79,2908.79) 3708.79,2968 ccw(c3708.79,3027.21) camera.13@3750.66,2985.34 ; camera.13@3757.73,2957.73 ccw(c3732.93,2932.93) 3732.93,2968 ccw(c3732.93,3003.07) camera.13@3757.73,2978.27
NetMCU1_97: camera.16 MCU1.97 | length 2023.4
  Top Layer w10: MCU1.97@2735.47,2143.49 3090.49,2143.49 v1(3100,2153) ; 3065.35,2143.49 ccw(c3065.35,2187.65) v1@3096.58,2156.42 ; 3089.49,2143.49 ccw(c3089.49,2163.51) v1@3103.65,2149.35 ; v1@3095.16,2153 cw(c3083.47,2153) 3091.73,2144.73 cw(c3100,2136.47) v1@3100,2148.16 ; v1@3100.58,2476.42 ccw(c3089.9,2487.1) 3105,2487.1 ; v1(3104,2473) 3105,2474 3105,2687 3107,2689 v1(3107,2690) ; 3105,2673.48 cw(c3123.52,2673.48) v1@3110.42,2686.58
  Bottom Layer w10: v1@3096.58,2156.42 ccw(c3078.65,2174.35) 3104,2174.35 ; v1(3100,2153) 3104,2157 v1(3104,2473) ; v1@3100.58,2469.58 cw(c3092.31,2461.31) 3104,2461.31 cw(c3115.69,2461.31) v1@3107.42,2469.58 ; v1(3107,2690) 3107,2691 3108,2692 3563,2692 3693,2822 3813,2822 ; v1@3110.42,2686.58 cw(c3123.52,2673.48) 3123.52,2692 ; 3829.35,2838.35 cw(c3865.94,2801.76) camera.16@3867.55,2853.48 ; 3832.49,2841.49 ccw(c3805.99,2868) camera.16@3843.47,2868 ; camera.16@3867.24,2843.48 ccw(c3864.95,2770.06) 3813,2822 ; camera.16@3868,2868 3859,2868 3813,2822
NetMCU1_116: MCU1.116
NetMCU1_117: camera.3 MCU1.117 | length 2191.8
  Top Layer w10: v1@2472.58,2958.58 cw(c2454.65,2940.65) 2480,2940.65 ; v1(2476,2962) 2480,2958 2480,2458.88 MCU1.117@2479.57,2458.45
  Bottom Layer w10: v1(2476,2962) 2480,2958 2481,2959 3268.61,2959 3768,3458.39 camera.3@3768,3468 ; v1@2479.42,2965.42 ccw(c2494.93,2980.93) 2494.93,2959 ; 3719.33,3409.72 ccw(c3661.05,3468) camera.3@3743.47,3468 ; 3736.4,3426.79 ccw(c3695.2,3468) camera.3@3753.47,3468 ; 3742.54,3432.93 cw(c3768,3407.46) camera.3@3768,3443.47
NetMCU1_122: camera.4 MCU1.122 | length 2387.1
  Top Layer w10: v1@2375.58,2944.58 cw(c2362.14,2931.14) 2381.14,2931.14 ; v1@2376.82,2943.68 cw(c2373.28,2936.65) 2381.14,2936.65 ; v1(2379,2948) 2379,2939 2381.14,2936.86 MCU1.122@2381.14,2458.45
  Bottom Layer w10: v1(2379,2948) 2388,2948 2394.84,2941.16 ; v1@2381.04,2943.61 cw(c2386.19,2932.5) 2394.84,2941.16 ; camera.4@3843.47,3468 cw(c3784.26,3468) 3826.13,3426.13 cw(c3868,3384.26) camera.4@3868,3443.47 ; camera.4@3853.47,3468 cw(c3818.4,3468) 3843.2,3443.2 cw(c3868,3418.4) camera.4@3868,3453.47 ; camera.4@3868,3468 3808.53,3408.53 3751.21,3408.53 3284.69,2942 2485.48,2942 2484.63,2941.16 2394.84,2941.16
NetMCU1_126: DHT11.3 MCU1.126 R16.2 | length 2527.9
  Top Layer w10: v1@2296.58,3018.58 cw(c2288.31,3010.31) 2300,3010.31 cw(c2311.69,3010.31) v1@2303.42,3018.58 ; v1(2300,3022) 2300,2997.6 2298.7,2996.3 2302.4,2992.6 MCU1.126@2302.4,2458.45
  Bottom Layer w10: v1(2300,3022) 2307,3029 3196,3029 3196,3031.06 R16.2@3499.94,3335 3530,3335 ; v1@2303.42,3018.58 cw(c2328.59,2993.41) 2328.59,3029 ; 3457.26,3292.32 cw(c3499.94,3249.64) R16.2@3499.94,3310 ; 3469.33,3304.39 ccw(c3443.72,3330) R16.2@3479.94,3330 ; 3474.33,3309.39 cw(c3499.94,3283.79) R16.2@3499.94,3320 ; R16.2@3518.38,3327.27 cw(c3530,3322.41) 3530,3335 ; R16.2@3518.38,3342.73 ccw(c3530,3347.59) 3530,3335 ; DHT11.3@3585.47,3575 cw(c3526.26,3575) 3568.13,3533.13 cw(c3610,3491.26) DHT11.3@3610,3550.47 ; DHT11.3@3595.47,3575 cw(c3560.4,3575) 3585.2,3550.2 cw(c3610,3525.4) DHT11.3@3610,3560.47 ; DHT11.3@3610,3575 3560,3525 3560,3365 3530,3335
NetMCU1_128: camera.5 MCU1.128 | length 2333.6
  Top Layer w10: MCU1.128@2263.03,2458.45 2263.03,2914.03 v1(2266,2917) ; 2263.03,2898.14 cw(c2284.86,2898.14) v1@2269.42,2913.58
  Bottom Layer w10: v1(2266,2917) 2269,2914 3314,2914 camera.5@3768,3368 ; v1@2269.42,2920.42 ccw(c2284.93,2935.93) 2284.93,2914 ; camera.5@3743.47,3368 cw(c3684.26,3368) 3726.13,3326.13 cw(c3768,3284.26) camera.5@3768,3343.47 ; camera.5@3753.47,3368 cw(c3718.4,3368) 3743.2,3343.2 cw(c3768,3318.4) camera.5@3768,3353.47
NetMCU1_129: camera.6 MCU1.129 | length 2434.3
  Top Layer w10: v1@2238.58,2890.58 cw(c2227.06,2879.06) 2243.35,2879.06 ; v1(2242,2894) 2243.35,2892.65 MCU1.129@2243.35,2458.45
  Bottom Layer w10: v1(2242,2894) 2244.16,2896.16 3338.84,2896.16 3751.21,3308.53 3808.53,3308.53 camera.6@3868,3368 ; v1@2245.42,2890.58 cw(c2258.9,2877.1) 2258.9,2896.16 ; camera.6@3843.47,3368 cw(c3784.26,3368) 3826.13,3326.13 cw(c3868,3284.26) camera.6@3868,3343.47 ; camera.6@3853.47,3368 cw(c3818.4,3368) 3843.2,3343.2 cw(c3868,3318.4) camera.6@3868,3353.47
NetMCU1_132: camera.8 MCU1.132 | length 2417.9
  Top Layer w10: MCU1.132@2184.29,2458.45 2184.29,2657.37 2184.5,2657.58 2184.5,2658.02 2186.84,2660.37 2186.84,2677.63 2184.29,2680.18 2184.29,2692.29 2216,2724 v1(2216,2852) ; v1@2212.58,2848.58 cw(c2204.31,2840.31) 2216,2840.31 cw(c2227.69,2840.31) v1@2219.42,2848.58
  Bottom Layer w10: v1(2216,2852) 3388,2852 3756,3220 3820,3220 camera.8@3868,3268 ; v1@2219.42,2848.58 cw(c2227.69,2840.31) 2227.69,2852 cw(c2227.69,2863.69) v1@2219.42,2855.42 ; camera.8@3843.47,3268 cw(c3784.26,3268) 3826.13,3226.13 cw(c3868,3184.26) camera.8@3868,3243.47 ; camera.8@3853.47,3268 cw(c3818.4,3268) 3843.2,3243.2 cw(c3868,3218.4) camera.8@3868,3253.47
NetP8_15: camera.15 MCU1.134 | length 2125.7
  Top Layer w10: MCU1.134@2144.92,2458.45 2144.92,2702.92 v1(2151,2709) ; 2144.92,2682.63 cw(c2177.37,2682.63) v1@2154.42,2705.58
  Bottom Layer w10: v1(2151,2709) 2153,2711 3529,2711 3688,2870 3690,2868 camera.15@3768,2868 ; v1@2154.42,2705.58 cw(c2167.52,2692.48) 2167.52,2711 ; camera.15@3750.66,2850.66 ccw(c3708.79,2808.79) 3708.79,2868 ccw(c3708.79,2927.21) camera.15@3750.66,2885.34 ; camera.15@3757.73,2857.73 ccw(c3732.93,2832.93) 3732.93,2868 ccw(c3732.93,2903.07) camera.15@3757.73,2878.27
NetP8_17: camera.17 MCU1.133 | length 2033.5
  Top Layer w10: MCU1.133@2164.61,2458.45 2164.61,2667.61 v1(2166,2669) ; 2164.61,2653.94 cw(c2181.06,2653.94) v1@2169.42,2665.58
  Bottom Layer w10: v1(2166,2669) 3586,2669 3685,2768 camera.17@3768,2768 ; v1@2169.42,2665.58 cw(c2177.69,2657.31) 2177.69,2669 cw(c2177.69,2680.69) v1@2169.42,2672.42 ; camera.17@3750.66,2750.66 ccw(c3708.79,2708.79) 3708.79,2768 ccw(c3708.79,2827.21) camera.17@3750.66,2785.34 ; camera.17@3757.73,2757.73 ccw(c3732.93,2732.93) 3732.93,2768 ccw(c3732.93,2803.07) camera.17@3757.73,2778.27
NetP8_18: camera.18 MCU1.100 | length 1550
  Top Layer w10: MCU1.100@2735.47,2202.54 v1(3303,2202.54) ; v1@3299.58,2199.12 ccw(c3291.31,2190.85) 3291.31,2202.54 ccw(c3291.31,2214.23) v1@3299.58,2205.97
  Bottom Layer w10: v1@3303,2207.39 ccw(c3303,2217.98) 3310.49,2210.49 ; v1@3304,2204 camera.18@3868,2768 ; v1@3307.84,2202.54 cw(c3320.63,2202.54) 3311.59,2211.59 ; camera.18@3843.47,2768 cw(c3784.26,2768) 3826.13,2726.13 cw(c3868,2684.26) camera.18@3868,2743.47 ; camera.18@3853.47,2768 cw(c3818.4,2768) 3843.2,2743.2 cw(c3868,2718.4) camera.18@3868,2753.47
PF0: IO1.1 MCU1.10 | length 1617.5
  Top Layer w10: IO1.1@595,2700.47 cw(c595,2658.5) 624.68,2688.18 ; IO1.1@595,2725 595,2717.86 1130,2182.86 MCU1.10@1849.65,2182.86 ; IO1.1@609.53,2725 ccw(c661.84,2725) 624.85,2688.01 ; IO1.1@619.53,2725 ccw(c695.98,2725) 641.92,2670.94
PF1: IO1.2 MCU1.11 | length 1632.1
  Top Layer w10: IO1.2@577.66,2607.66 cw(c535.79,2565.79) 595,2565.79 cw(c654.21,2565.79) IO1.2@612.34,2607.66 ; IO1.2@584.73,2614.73 cw(c559.93,2589.93) 595,2589.93 cw(c630.07,2589.93) IO1.2@605.27,2614.73 ; IO1.2@595,2625 595,2560 991.83,2163.17 MCU1.11@1849.65,2163.17
PF2: IO1.3 MCU1.12 | length 1822.7
  Top Layer w10: IO1.3@495,2700.47 cw(c495,2641.26) 536.87,2683.13 cw(c578.74,2725) IO1.3@519.53,2725 ; IO1.3@495,2710.47 cw(c495,2675.4) 519.8,2700.2 cw(c544.6,2725) IO1.3@509.53,2725 ; IO1.3@495,2725 545,2675 545,2540 550,2540 946.51,2143.49 MCU1.12@1849.65,2143.49
PF3: IO1.4 MCU1.13 | length 1765.6
  Top Layer w10: IO1.4@477.66,2607.66 cw(c435.79,2565.79) 495,2565.79 cw(c554.21,2565.79) IO1.4@512.34,2607.66 ; IO1.4@484.73,2614.73 cw(c459.93,2589.93) 495,2589.93 cw(c530.07,2589.93) IO1.4@505.27,2614.73 ; IO1.4@495,2625 495,2540 909.16,2125.84 1847.61,2125.84 MCU1.13@1849.65,2123.8 ; MCU1.13@1814.29,2125.84 cw(c1814.29,2118.88) MCU1.13@1819.21,2123.8
PF4: IO1.5 MCU1.14 | length 1933.2
  Top Layer w10: IO1.5@395,2700.47 cw(c395,2641.26) 436.87,2683.13 cw(c478.74,2725) IO1.5@419.53,2725 ; IO1.5@395,2710.47 cw(c395,2675.4) 419.8,2700.2 cw(c444.6,2725) IO1.5@409.53,2725 ; IO1.5@395,2725 445,2675 445,2550 890.88,2104.12 MCU1.14@1849.65,2104.12